# Altium PCB klor1_4_B.PcbDoc (part 1 of 2)
Units mm, origin at the board's own origin, x right, y up, seen from the top; angles counter-clockwise.
Board outline 323.11 x 118.19 mm, 2 copper layers (Top Layer, Bottom Layer); 172 components, 130 nets, 808 pads, 101 vias.
Unrouted connection lines stored in the file: 161.
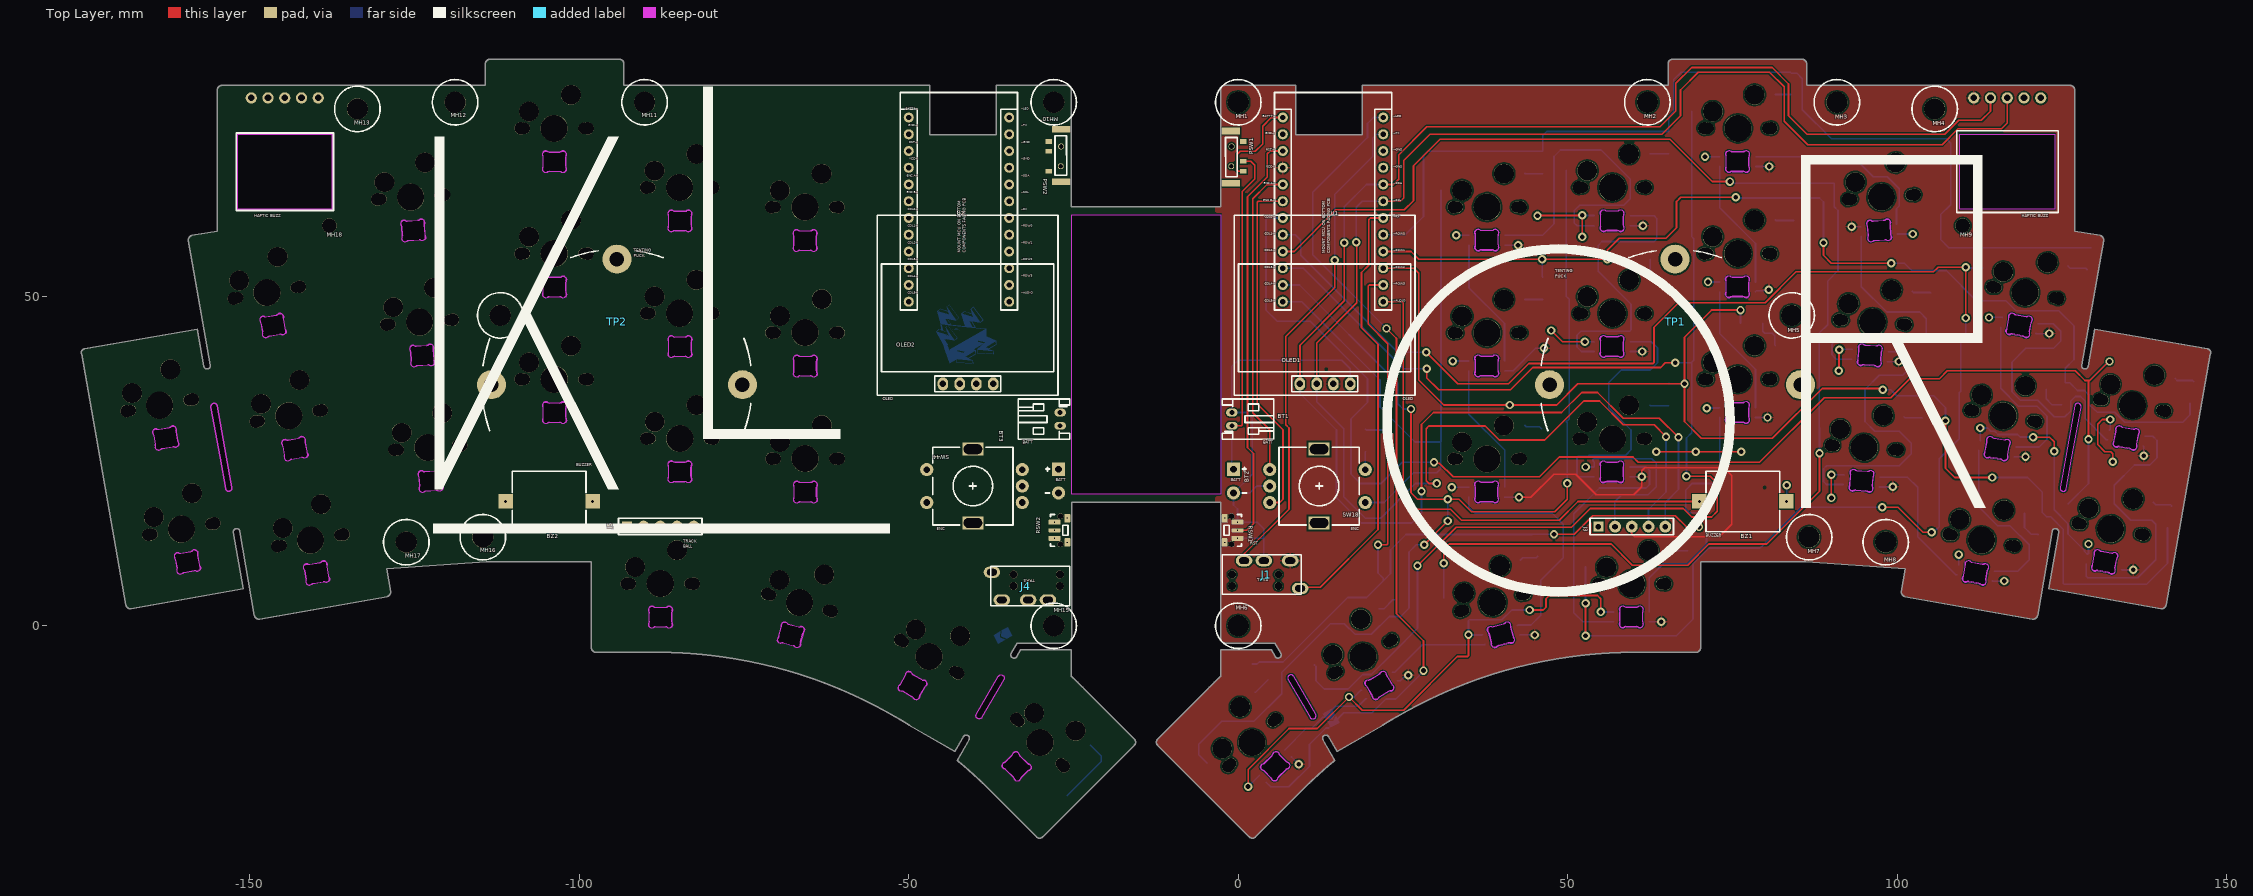
[diagram p0: Top Layer view]
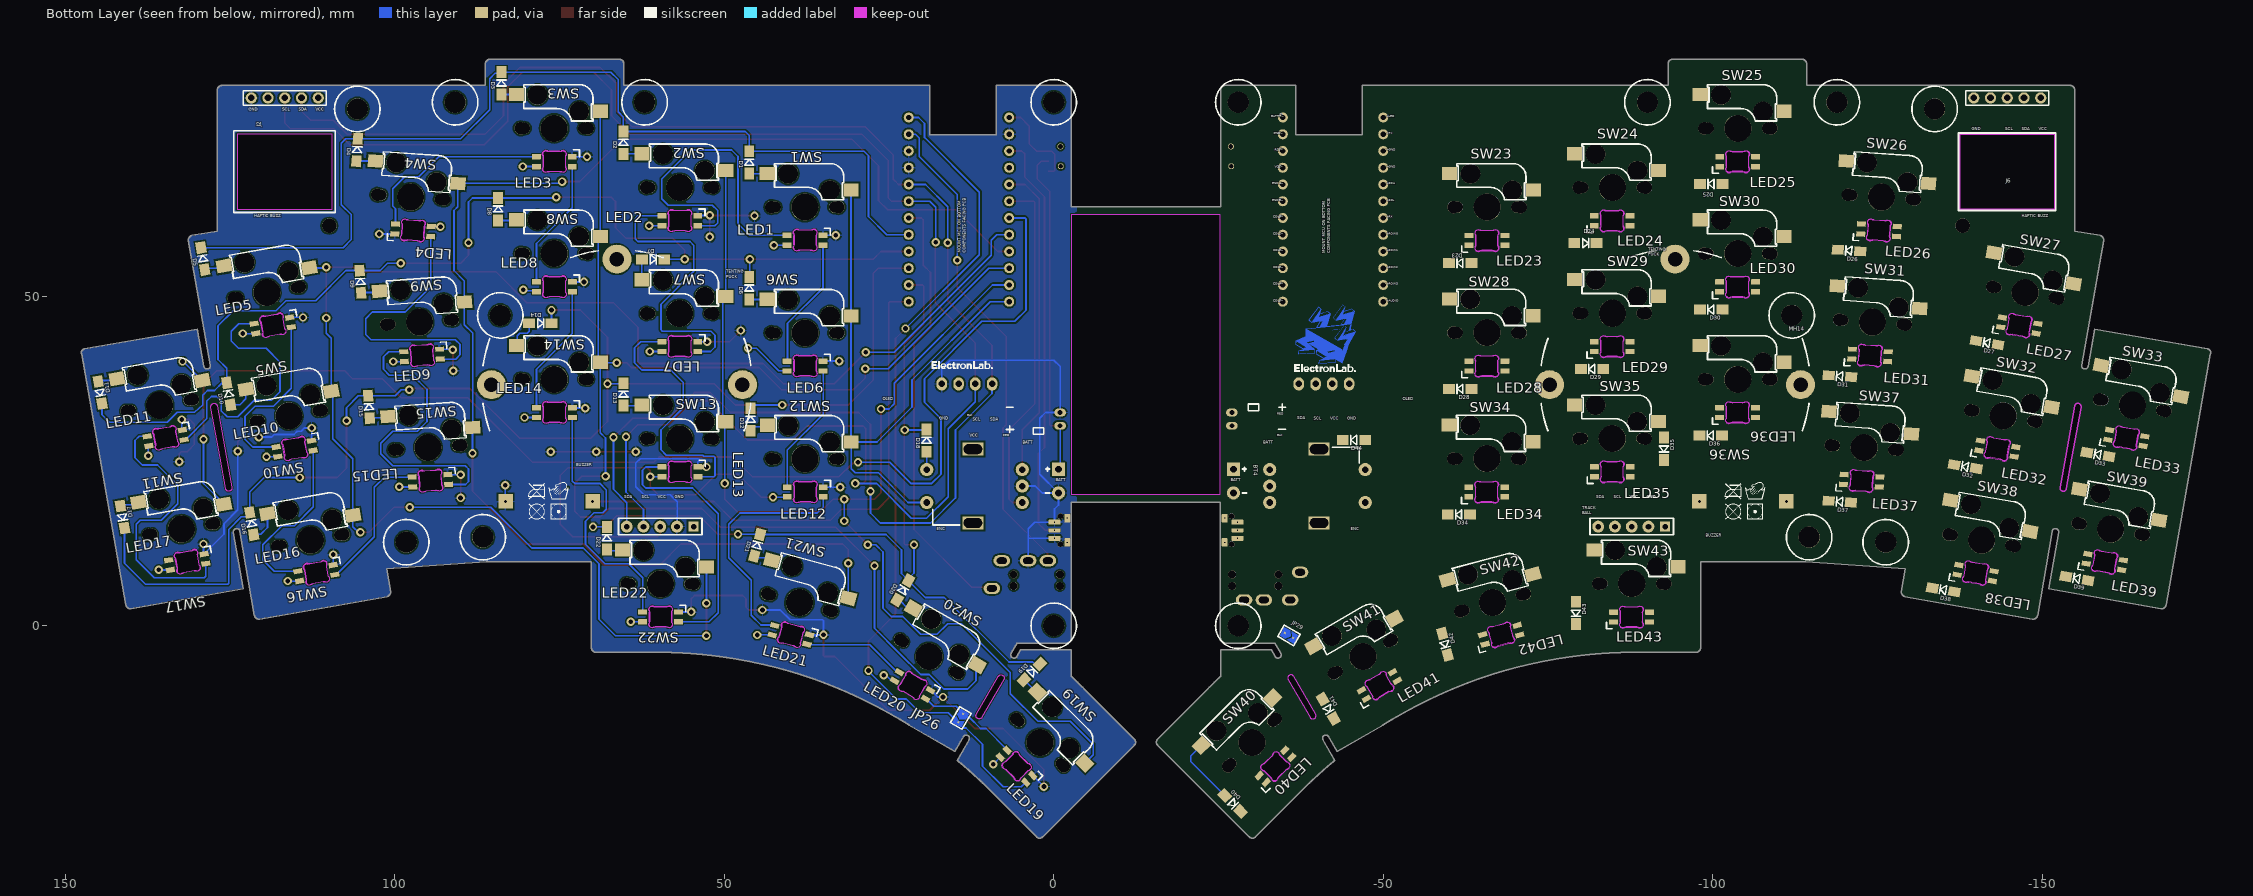
[diagram p1: Bottom Layer view, seen from below]

## Layer stack, top to bottom
Top Solder: solder mask 0.0102, Solder Resist, Dk 3.5
Top Layer: signal copper 0.0356
Dielectric 1: dielectric 0.32, FR-4, Dk 4.8
Bottom Layer: signal copper 0.0356
Bottom Solder: solder mask 0.0102, Solder Resist, Dk 3.5

## Board outline
11385 vertices, not listed, extent -175.553,-32.233 147.553,85.954
cut-out: 938 vertices, not listed, extent -39.803,-14.147 -35.499,-7.445
cut-out: -137.48,63.2 -137.48,74.6 -151.88,74.6 -151.88,63.2
cut-out: 753 vertices, not listed, extent -155.897,20.404 -152.693,33.756
cut-out: -151.88,63.2 -151.88,74.6 -137.48,74.6 -137.48,63.2
cut-out: 938 vertices, not listed, extent -39.803,-14.147 -35.499,-7.445
cut-out: 753 vertices, not listed, extent -155.897,20.404 -152.693,33.756
cut-out: -25.301,19.951 -25.301,62.4 -2.7,62.4 -2.689,62.389 -2.689,19.941
cut-out: 938 vertices, not listed, extent 7.499,-14.147 11.803,-7.445
cut-out: 109.48,63.2 109.48,74.6 123.88,74.6 123.88,63.2
cut-out: 753 vertices, not listed, extent 124.693,20.404 127.897,33.756

## Design rules (kind name [scope] priority, off if disabled: settings)
BoardOutlineClearance BoardOutlineClearance_1 [(OnLayer('Bottom Overlay') OR OnLayer('Top Overlay'))] p1: gap=0 ignorepadtopadclearanceinfootprint=FALSE
BoardOutlineClearance MH [(HasFootprint('MOUNTINGHOLE_3.2MM_M3') OR HasFootprint('MountingHole_2.2mm_M2'))] p2: gap=0 ignorepadtopadclearanceinfootprint=FALSE
BoardOutlineClearance [All] p3: gap=0.05 ignorepadtopadclearanceinfootprint=FALSE
BoardOutlineClearance LED_CUTOUT [HasFootprint('SK6812MINI-E')] p4: gap=0.01 ignorepadtopadclearanceinfootprint=FALSE
Clearance JUMPERS_RSW [All vs (HasFootprint('SW_PUSH_1P1T-MP_NO_HORIZONTAL_ALPS_SKRTLAE010_BOTH_SIDES') OR HasFootprint('SolderJumper-2_P1.3mm_Open_TrianglePad1.0x1.5mm'))] p1: gap=0.01 ignorepadtopadclearanceinfootprint=FALSE
Clearance LED [HasFootprint('SK6812MINI-E')] p2: gap=0.2 ignorepadtopadclearanceinfootprint=FALSE
Clearance [All] p3: gap=0.254 ignorepadtopadclearanceinfootprint=FALSE
HoleSize [All] p1: absolutevalues=TRUE maxlimit=5 minlimit=0.025 maxpercent=80.000 minpercent=20.000
HoleToHoleClearance SWITCH_SOCKET [All vs HasFootprint('CHERRY-CPG151101S11')] p1: gap=0 allowstackedmicrovias=TRUE
HoleToHoleClearance [All] p2: gap=0.254 allowstackedmicrovias=TRUE
MinimumSolderMaskSliver JUMPERS_RSW [All vs (HasFootprint('SolderJumper-2_P1.3mm_Open_TrianglePad1.0x1.5mm') OR HasFootprint('SW_PUSH_1P1T-MP_NO_HORIZONTAL_ALPS_SKRTLAE010_BOTH_SIDES'))] p1: minsoldermaskwidth=0.01
MinimumSolderMaskSliver [All] p2: minsoldermaskwidth=0.254
PolygonConnect [All] p1: connectstyle=Relief reliefconductorwidth=0.254 reliefentries=4 polygonreliefangle="90 Angle" airgapwidth=0.254
RoutingVias [All] p1: holewidth=0.711 width=1.27 viastyle="Through Hole" minholewidth=0.711 minwidth=1.27 maxholewidth=0.711 maxwidth=1.27
SilkToSilkClearance [All] p1: silktosilkclearance=0
SilkToSolderMaskClearance [IsPad] p1: minsilkscreentomaskgap=0 clearancetoexposedcopper=TRUE
SolderMaskExpansion [All] p1: expansion=0.102 istentingtop=FALSE
SupplyNets "Schematic Supply Nets" [InNet('GND_R')] p1: voltage=0.000
SupplyNets "Schematic Supply Nets_6" [InNet('PAD2')] p2: voltage=0.000
SupplyNets "Schematic Supply Nets_4" [InNet('+BATT_L')] p3: voltage=0.000
SupplyNets "Schematic Supply Nets_3" [InNet('VCC_L')] p4: voltage=0.000
SupplyNets "Schematic Supply Nets_2" [InNet('+BATT')] p5: voltage=0.000
SupplyNets "Schematic Supply Nets_1" [InNet('VCC')] p6: voltage=0.000
Width [All] p1: maxlimit=0.254 minlimit=0.254 preferedwidth=0.254
25 further rules are at their usual default settings.

## Classes and differential pairs
component class klor1_4_R: BT1 BT2 BZ1 D1 D2 D3 D4 D5 D6 D7 D8 D9 D10 D11 D12 D13 D14 D15 D16 D17 D18 D19 D20 D21 D22 J1 J2 J3 JP1 JP2 JP3 JP4 JP16 JP17 JP18 JP22 JP24 JP26 LED1 LED2 LED3 LED4 LED5 LED6 LED7 LED8 LED9 LED10 LED11 LED12 LED13 LED14 LED15 LED16 LED17 LED19 LED20 LED21 LED22 MH1 MH2 MH3 MH4 MH5 MH6 MH7 MH8 MH9 OLED1 PSW1 RSW1 SW1 SW2 SW3 SW4 SW5 SW6 SW7 SW8 SW9 SW10 SW11 SW12 SW13 SW14 SW15 SW16 SW17 SW18 SW19 SW20 SW21 SW22 TP2 U1
component class klor1_4_L: BT3 BT4 BZ2 D23 D24 D25 D26 D27 D28 D29 D30 D31 D32 D33 D34 D35 D36 D37 D38 D39 D40 D41 D42 D43 D44 J4 J5 J6 JP10 JP11 JP29 JP30 JP31 JP34 JP35 JP39 JP45 JP47 JP48 JP49 JP50 LED23 LED24 LED25 LED26 LED27 LED28 LED29 LED30 LED31 LED32 LED33 LED34 LED35 LED36 LED37 LED38 LED39 LED40 LED41 LED42 LED43 MH10 MH11 MH12 MH13 MH14 MH15 MH16 MH17 MH18 OLED2 PSW2 RSW2 SW23 SW24 SW25 SW26 SW27 SW28 SW29 SW30 SW31 SW32 SW33 SW34 SW35 SW36 SW37 SW38 SW39 SW40 SW41 SW42 SW43 SW44 TP1 U2

## Components (designator, comment, footprint, x,y, rotation, side; value= is the part's Value field where it differs from the comment)
BT1 "JST Connector" JST_PH_REVERSIBLE -0.97,30.35 r90 top
BT2 "Battery_Cell" custombatteryconnector_small -0.725,21.95 r270 top locked
BT3 "JST Connector" JST_PH_REVERSIBLE -27.03,32.35 r270 top
BT4 "Battery_Cell" custombatteryconnector_small -27.275,21.95 r270 bottom locked
BZ1 "Buzzer" BUZZER_MALLORY_AST1109MLTRQ_REVERSIBLE 76.575,18.86 r0 top locked
BZ2 "Buzzer" BUZZER_MALLORY_AST1109MLTRQ_REVERSIBLE -104.575,18.86 r0 top locked
D1 "D_Small" DIODE_SOD123 46.2,70.3 r270 bottom
D2 "D_Small" DIODE_SOD123 65.3,73.3 r270 bottom
D3 "D_Small" DIODE_SOD123 83.8,82.3 r270 bottom
D4 "D_Small" DIODE_SOD123 105.7,72.2 r274 bottom
D5 "D_Small" DIODE_SOD123 129.1,55.7 r260 bottom
D6 "D_Small" DIODE_SOD123 46.2,51.2 r270 bottom
D7 "D_Small" DIODE_SOD123 60.8,55.6 r0 bottom
D8 "D_Small" DIODE_SOD123 84.3,63.2 r270 bottom
D9 "D_Small" DIODE_SOD123 105.2,52.2 r266 bottom
D10 "D_Small" DIODE_SOD123 125.2,35.2 r260 bottom
D11 "D_Small" DIODE_SOD123 144.7,35.4 r80 bottom
D12 "D_Small" DIODE_SOD123 46,31.3 r270 bottom
D13 "D_Small" DIODE_SOD123 65.3,35.1 r270 bottom
D14 "D_Small" DIODE_SOD123 77.9,45.9 r0 bottom
D15 "D_Small" DIODE_SOD123 103.9,33.2 r266 bottom
D16 "D_Small" DIODE_SOD123 121.7,15.5 r260 bottom
D17 "D_Small" DIODE_SOD123 141.3,16.5 r80 bottom
D18 "D_Small" DIODE_SOD123 19.3,28.1 r270 bottom
D19 "D_Small" DIODE_SOD123 3.3,-7 r315 bottom
D20 "D_Small" DIODE_SOD123 22.9,5.4 r300 bottom
D21 "D_Small" DIODE_SOD123 45,12.2 r285 bottom
D22 "D_Small" DIODE_SOD123 67.8,13.3 r270 bottom
D23 "D_Small" DIODE_SOD123 -61.68,55.05 r180 bottom
D24 "D_Small" DIODE_SOD123 -80.68,58.05 r0 bottom
D25 "D_Small" DIODE_SOD123 -99.78,67.05 r180 bottom
D26 "D_Small" DIODE_SOD123 -120.676,56.931 r184 bottom
D27 "D_Small" DIODE_SOD123 -141.606,42.945 r190 bottom
D28 "D_Small" DIODE_SOD123 -61.68,35.95 r180 bottom
D29 "D_Small" DIODE_SOD123 -81.677,38.953 r180 bottom
D30 "D_Small" DIODE_SOD123 -99.759,47.965 r180 bottom
D31 "D_Small" DIODE_SOD123 -119.284,37.869 r184 bottom
D32 "D_Small" DIODE_SOD123 -138.306,24.145 r190 bottom
D33 "D_Small" DIODE_SOD123 -158.435,25.98 r190 bottom
D34 "D_Small" DIODE_SOD123 -61.48,16.86 r180 bottom
D35 "D_Small" DIODE_SOD123 -92.575,26.87 r90 bottom
D36 "D_Small" DIODE_SOD123 -99.68,28.85 r180 bottom
D37 "D_Small" DIODE_SOD123 -119.276,18.831 r184 bottom
D38 "D_Small" DIODE_SOD123 -134.98,5.45 r190 bottom
D39 "D_Small" DIODE_SOD123 -155.255,7.17 r190 bottom
D40 "D_Small" DIODE_SOD123 -27.157,-26.952 r45 bottom
D41 "D_Small" DIODE_SOD123 -41.648,-12.61 r60 bottom
D42 "D_Small" DIODE_SOD123 -59.367,-2.789 r75 bottom
D43 "D_Small" DIODE_SOD123 -79.225,1.95 r90 bottom
D44 "D_Small" DIODE_SOD123 -45.56,28.19 r180 bottom
J1 "MJ-4PP-9" MJ-4PP-9 -2.42,7.775 r90 top locked
J2 "Haptic Buzz" "PIMORONI HAPTIC BUZZ DRV2605L DRIVER" 116.68,69.7 r180 bottom
J3 "lv27" lvc27_onlyInput 54.63,15.05 r90 top locked
J4 "MJ-4PP-9" MJ-4PP-9 -25.58,6.025 r270 top
J5 "lv2" lvc27_onlyInput -92.78,15.05 r90 top locked value=lv27
J6 "lv2" "PIMORONI HAPTIC BUZZ DRV2605L DRIVER" -144.68,69.7 r180 bottom locked value="Haptic Buzz"
JP26 "Device_Jumper_NO_Small" SolderJumper-2_P1.3mm_Open_TrianglePad1.0x1.5mm 14.1,-14 r120 bottom
JP29 "Device_Jumper_NO_Small" SOLDERJUMPER-2_P1.3MM_OPEN_TRIANGLEPAD1.0X1.5MM -35.697,-1.459 r30 bottom
LED1 "SK6812MINI-E" SK6812MINI-E#1 37.722,58.506 r0 bottom
LED2 "SK6812MINI-E" SK6812MINI-E#1 56.743,61.447 r0 bottom
LED3 "SK6812MINI-E" SK6812MINI-E#1 75.783,70.427 r0 bottom
LED4 "SK6812MINI-E" SK6812MINI-E#1 97.211,60.001 r184 bottom
LED5 "SK6812MINI-E" SK6812MINI-E#2 118.496,45.568 r350 bottom
LED6 "SK6812MINI-E" SK6812MINI-E#1 37.72,39.412 r0 bottom
LED7 "SK6812MINI-E" SK6812MINI-E#1 56.733,42.367 r0 bottom
LED8 "SK6812MINI-E" SK6812MINI-E#1 75.769,51.422 r0 bottom
LED9 "SK6812MINI-E" SK6812MINI-E#1 95.851,41.021 r356 bottom
LED10 "SK6812MINI-E" SK6812MINI-E#2 115.173,26.87 r350 bottom
LED11 "SK6812MINI-E" SK6812MINI-E#2 134.756,28.488 r350 bottom
LED12 "SK6812MINI-E" SK6812MINI-E#1 37.703,20.297 r0 bottom
LED13 "SK6812MINI-E" SK6812MINI-E#1 56.719,23.349 r0 bottom
LED14 "SK6812MINI-E" SK6812MINI-E#1 75.769,32.349 r0 bottom
LED15 "SK6812MINI-E" SK6812MINI-E#1 94.591,21.991 r356 bottom
LED16 "SK6812MINI-E" SK6812MINI-E#2 111.886,8.008 r350 bottom
LED17 "SK6812MINI-E" SK6812MINI-E#2 131.476,9.688 r350 bottom
LED19 "SK6812MINI-E" SK6812MINI-E#1 5.632,-21.318 r45 bottom
LED20 "SK6812MINI-E" SK6812MINI-E#3 21.43,-9.065 r30 bottom
LED21 "SK6812MINI-E" SK6812MINI-E#1 39.882,-1.376 r15 bottom
LED22 "SK6812MINI-E" SK6812MINI-E#1 59.657,1.34 r0 bottom
LED23 "SK6812MINI-E" SK6812MINI-E#1 -65.743,58.467 r180 bottom
LED24 "SK6812MINI-E" SK6812MINI-E#1 -84.743,61.447 r180 bottom
LED25 "SK6812MINI-E" SK6812MINI-E#1 -103.783,70.427 r180 bottom
LED26 "SK6812MINI-E" SK6812MINI-E#1 -125.211,60.001 r184 bottom
LED27 "SK6812MINI-E" SK6812MINI-E#1 -146.496,45.568 r190 bottom
LED28 "SK6812MINI-E" SK6812MINI-E#1 -65.72,39.412 r180 bottom
LED29 "SK6812MINI-E" SK6812MINI-E#1 -84.733,42.367 r180 bottom
LED30 "SK6812MINI-E" SK6812MINI-E#1 -103.769,51.422 r180 bottom
LED31 "SK6812MINI-E" SK6812MINI-E#1 -123.851,41.021 r184 bottom
LED32 "SK6812MINI-E" SK6812MINI-E#1 -143.173,26.87 r190 bottom
LED33 "SK6812MINI-E" SK6812MINI-E#1 -162.756,28.488 r190 bottom
LED34 "SK6812MINI-E" SK6812MINI-E#1 -65.703,20.297 r180 bottom
LED35 "SK6812MINI-E" SK6812MINI-E#1 -84.75,23.375 r180 bottom
LED36 "SK6812MINI-E" SK6812MINI-E#1 -103.769,32.349 r180 bottom
LED37 "SK6812MINI-E" SK6812MINI-E#1 -122.591,21.991 r184 bottom
LED38 "SK6812MINI-E" SK6812MINI-E#1 -139.886,8.008 r190 bottom
LED39 "SK6812MINI-E" SK6812MINI-E#1 -159.476,9.688 r190 bottom
LED40 "SK6812MINI-E" SK6812MINI-E#1 -33.632,-21.318 r135 bottom
LED41 "SK6812MINI-E" SK6812MINI-E#1 -49.43,-9.065 r150 bottom
LED42 "SK6812MINI-E" SK6812MINI-E#1 -67.893,-1.366 r165 bottom
LED43 "SK6812MINI-E" SK6812MINI-E#1 -87.683,1.327 r180 bottom
MH1 "MountingHole_3.2mm_M3" MOUNTINGHOLE_3.2MM_M3 0,79.43 r0 top locked
MH2 "MountingHole_3.2mm_M3" MOUNTINGHOLE_3.2MM_M3 62.08,79.43 r0 top locked
MH3 "MountingHole_3.2mm_M3" MOUNTINGHOLE_3.2MM_M3 90.83,79.43 r0 top locked
MH4 "MountingHole_3.2mm_M3" MOUNTINGHOLE_3.2MM_M3 105.67,78.42 r0 top locked
MH5 "MountingHole_3.2mm_M3" MOUNTINGHOLE_3.2MM_M3 83.98,47.1 r0 top locked
MH6 "MountingHole_3.2mm_M3" MOUNTINGHOLE_3.2MM_M3 0,0 r0 top locked
MH7 "MountingHole_3.2mm_M3" MOUNTINGHOLE_3.2MM_M3 86.63,13.44 r0 top locked
MH8 "MountingHole_3.2mm_M3" MOUNTINGHOLE_3.2MM_M3 98.24,12.68 r0 top locked
MH9 "MountingHole_2.2mm_M2" MountingHole_2.2mm_M2 109.93,60.7 r0 top
MH10 "MountingHole_3.2mm_M3" MOUNTINGHOLE_3.2MM_M3 -28,79.43 r0 top locked
MH11 "MountingHole_3.2mm_M3" MOUNTINGHOLE_3.2MM_M3 -90.08,79.43 r0 top locked
MH12 "MountingHole_3.2mm_M3" MOUNTINGHOLE_3.2MM_M3 -118.83,79.43 r0 top locked
MH13 "MountingHole_3.2mm_M3" MOUNTINGHOLE_3.2MM_M3 -133.67,78.42 r0 top locked
MH14 "MountingHole_3.2mm_M3" MOUNTINGHOLE_3.2MM_M3 -111.98,47.1 r180 bottom locked
MH15 "MountingHole_3.2mm_M3" MOUNTINGHOLE_3.2MM_M3 -28,0 r180 top locked
MH16 "MountingHole_3.2mm_M3" MOUNTINGHOLE_3.2MM_M3 -114.63,13.44 r0 top locked
MH17 "MountingHole_3.2mm_M3" MOUNTINGHOLE_3.2MM_M3 -126.24,12.68 r0 top locked
MH18 "MountingHole_2.2mm_M2" MountingHole_2.2mm_M2 -137.93,60.7 r0 top
OLED1 "SSD1306" SSD1306_128X64OLED 13.359,47.295 r180 top locked
OLED2 "SSD1306" SSD1306_128X64OLED -40.809,47.295 r180 top locked
PSW1 "SW_DPDT_x2" MSK12C02_REVERSIBLE -2.419,74.974 r0 top locked
PSW2 "SW_DPDT_x2" MSK12C02_REVERSIBLE -25.531,67.474 r180 top locked
RSW1 "SW_Push" SW_PUSH_1P1T-MP_NO_HORIZONTAL_ALPS_SKRTLAE010_BOTH_SIDES -1.01,14.49 r270 top locked
RSW2 "SW_Push" SW_PUSH_1P1T-MP_NO_HORIZONTAL_ALPS_SKRTLAE010_BOTH_SIDES -26.99,14.49 r90 top locked
SW1 "SW_PUSH-MX" CHERRY-CPG151101S11 37.765,63.52 r180 bottom locked
SW2 "SW_PUSH-MX" CHERRY-CPG151101S11 56.765,66.5 r180 bottom locked
SW3 "SW_PUSH-MX" CHERRY-CPG151101S11 75.805,75.48 r180 bottom locked
SW4 "SW_PUSH-MX" CHERRY-CPG151101S11 97.585,65.04 r184 bottom locked
SW5 "SW_PUSH-MX" CHERRY-CPG151101S11 119.395,50.54 r170 bottom locked
SW6 "SW_PUSH-MX" CHERRY-CPG151101S11 37.763,44.427 r180 bottom locked
SW7 "SW_PUSH-MX" CHERRY-CPG151101S11 56.776,47.382 r180 bottom locked
SW8 "SW_PUSH-MX" CHERRY-CPG151101S11 75.791,56.475 r180 bottom locked
SW9 "SW_PUSH-MX" CHERRY-CPG151101S11 96.225,46.06 r176 bottom locked
SW10 "SW_PUSH-MX" CHERRY-CPG151101S11 116.072,31.842 r170 bottom locked
SW11 "SW_PUSH-MX" CHERRY-CPG151101S11 135.655,33.46 r170 bottom locked
SW12 "SW_PUSH-MX" CHERRY-CPG151101S11 37.746,25.312 r180 bottom locked
SW13 "SW_PUSH-MX" CHERRY-CPG151101S11 56.762,28.364 r180 bottom locked
SW14 "SW_PUSH-MX" CHERRY-CPG151101S11 75.791,37.402 r180 bottom locked
SW15 "SW_PUSH-MX" CHERRY-CPG151101S11 94.965,27.03 r176 bottom locked
SW16 "SW_PUSH-MX" CHERRY-CPG151101S11 112.785,12.98 r170 bottom locked
SW17 "SW_PUSH-MX" CHERRY-CPG151101S11 132.375,14.66 r170 bottom locked
SW18 "RotaryEncoder_Switch" ROTARYENCODER_ALPS_EC11E-SWITCH_VERTICAL_H20MM-KEEBIO_MODIFIED 12.27,21.2 r0 top locked
SW19 "SW_PUSH-MX" CHERRY-CPG151101S11 2.075,-17.73 r225 bottom locked
SW20 "SW_PUSH-MX" CHERRY-CPG151101S11 18.923,-4.678 r210 bottom locked
SW21 "SW_PUSH-MX" CHERRY-CPG151101S11 38.595,3.51 r195 bottom locked
SW22 "SW_PUSH-MX" CHERRY-CPG151101S11 59.699,6.354 r180 bottom locked
SW23 "SW_PUSH-MX" CHERRY-CPG151101S11 -65.765,63.52 r180 bottom locked
SW24 "SW_PUSH-MX" CHERRY-CPG151101S11 -84.765,66.5 r180 bottom locked
SW25 "SW_PUSH-MX" CHERRY-CPG151101S11 -103.805,75.48 r180 bottom locked
SW26 "SW_PUSH-MX" CHERRY-CPG151101S11 -125.585,65.04 r184 bottom
SW27 "SW_PUSH-MX" CHERRY-CPG151101S11 -147.395,50.54 r190 bottom
SW28 "SW_PUSH-MX" CHERRY-CPG151101S11 -65.742,44.465 r180 bottom locked
SW29 "SW_PUSH-MX" CHERRY-CPG151101S11 -84.755,47.42 r180 bottom locked
SW30 "SW_PUSH-MX" CHERRY-CPG151101S11 -103.791,56.475 r180 bottom locked
SW31 "SW_PUSH-MX" CHERRY-CPG151101S11 -124.225,46.06 r184 bottom
SW32 "SW_PUSH-MX" CHERRY-CPG151101S11 -144.072,31.842 r190 bottom
SW33 "SW_PUSH-MX" CHERRY-CPG151101S11 -163.655,33.46 r190 bottom
SW34 "SW_PUSH-MX" CHERRY-CPG151101S11 -65.725,25.35 r180 bottom locked
SW35 "SW_PUSH-MX" CHERRY-CPG151101S11 -84.741,28.402 r180 bottom locked
SW36 "SW_PUSH-MX" CHERRY-CPG151101S11 -103.791,37.402 r180 bottom locked
SW37 "SW_PUSH-MX" CHERRY-CPG151101S11 -122.965,27.03 r184 bottom
SW38 "SW_PUSH-MX" CHERRY-CPG151101S11 -140.785,12.98 r190 bottom
SW39 "SW_PUSH-MX" CHERRY-CPG151101S11 -160.375,14.66 r190 bottom
SW40 "SW_PUSH-MX" CHERRY-CPG151101S11 -30.075,-17.73 r135 bottom
SW41 "SW_PUSH-MX" CHERRY-CPG151101S11 -46.923,-4.678 r150 bottom
SW42 "SW_PUSH-MX" CHERRY-CPG151101S11 -66.595,3.51 r165 bottom
SW43 "SW_PUSH-MX" CHERRY-CPG151101S11 -87.705,6.38 r180 bottom
SW44 "RotaryEncoder_Switch" ROTARYENCODER_ALPS_EC11E-SWITCH_VERTICAL_H20MM-KEEBIO_MODIFIED -40.27,21.2 r180 top locked
TP1 "tenting-puck" SplitkbTentingPuckWithoutCenterHole 66.275,36.58 r270 top locked
TP2 "tenting-puck" SplitkbTentingPuckWithoutCenterHole -94.275,36.58 r270 top locked
U1 "ProMicro" PROMICRO 14.28,63.54 r0 top locked
U2 "ProMicro" PROMICRO -42.478,63.54 r0 top locked

## Footprints (in the part's own frame and the unit in brackets; to place one, negate y for a bottom-side part, rotate by r counter-clockwise, add the part's x,y. Pads: shape width x height; smd on the part's side, far side on the other; paste and mask are expansions set on the pad)
BUZZER_MALLORY_AST1109MLTRQ_REVERSIBLE [mm]
  rect 2.2x2.2 hole 0.5 mask+0: 1(-6.6,0) 2(6.6,0)
  silkscreen extent -5.6,-4.6 5.6,4.6
CHERRY-CPG151101S11 [mm]
  rect 2.3x2 smd mask+0: 1(7,2.58) 2(-5.7,5.12)
  round 1.9 hole 1.9 paste-2539.97 mask+0: Un1(-5.08,0) Un9(5.08,0)
  round 1.7 hole 1.7 paste-2539.97 mask+0: Un2(-4.5,0) Un8(4.5,0)
  round 3 hole 3 paste-2539.97 mask+0: Un4(-2.54,5.08) Un7(3.81,2.54)
  round 4.1 hole 4.1 paste-2539.97 mask+0: Un5(0,0)
  silkscreen extent -4.6,1.1 5.9,6.6, body extent -6.45,0.87 7.69,6.76, height 1.9
custombatteryconnector_small [mm]
  rrect7% 2x2 hole 1 mask+0: 1(-1.8,0)
  round 2 hole 1 mask+0: 2(1.8,0)
DIODE_SOD123 [mm]
  rect 1.8x1.5 smd mask+0: 1(-1.7,0) 2(1.7,0)
  silkscreen extent -0.5,-0.7 0.4,0.7, body extent -1.88,-0.85 1.88,0.85, height 1.2
JST_PH_REVERSIBLE [mm]
  rrect100% 1.2x1.75 hole 0.75 paste-2539.97 mask+0: 1(0,0) 2(2,0)
  silkscreen extent -2.06,-6.36 4.06,1.46
lvc27_onlyInput [mm]
  rect 1.524x1.524 hole 0.85 mask+0: 1(0,0)
  round 1.8 hole 0.85 mask+0: 2(0,-2.54) 3(0,-5.08) 4(0,-7.62) 5(0,-10.16)
  silkscreen extent -1.25,-11.4 1.25,1.25
MJ-4PP-9 [mm]
  rrect100% 1.7x2.5 hole 1.5 slot 1 at 0 deg paste-2539.97 mask+0: 1(2.1,-10.3) 2(2.1,-6.3) 3(-2.1,-11.8) 4(2.1,-3.3)
  round 1.2 hole 1.2 paste-2539.97 mask+0: Un1(-1.75,-1.5) Un2(-1.75,-8.5) Un3(0,-1.5) Un4(0,-8.5)
  silkscreen extent -3,-12 3,0
MountingHole_2.2mm_M2 [mm]
  round 2.2 hole 2.2 mask+0: Un1(0,0)
MOUNTINGHOLE_3.2MM_M3 [mm]
  round 3.2 hole 3.2 paste-2539.97 mask+0: Un1(0,0)
  silkscreen extent -3.45,-3.45 3.45,3.45
MSK12C02_REVERSIBLE [mm]
  rect 1x0.7 smd mask+0: 1(3.2,-1.5) 2(3.2,-4.5) 3(3.2,-6)
  rect 2.8x1 smd mask+0: NC(1.3,-7.85) NC(1.3,0.1)
  round 0.9 hole 0.7 paste-2539.97 mask+0: Un1(1.35,-5.25) Un2(1.4,-2.25)
  silkscreen extent 0.48,-6.86 2.29,-0.89
"PIMORONI HAPTIC BUZZ DRV2605L DRIVER" [mm]
  round 1.7 hole 1 paste-2539.97 mask+0: 1(5.08,10.4)
  rrect100% 1.7x1.7 hole 1 paste-2539.97 mask+0: 2(2.54,10.4) 3(0,10.4) 4(-2.54,10.4) 5(-5.08,10.4)
  silkscreen extent -6.3,9.3 6.3,11.5
PROMICRO [mil]
  round 60 hole 32 paste-99999 mask+0: 1(303.89,534.42) 2(303.89,434.42) 3(303.89,334.42) 4(303.89,234.42) 5(303.89,134.42) 6(303.89,34.42) 7(303.89,-65.58) 8(303.89,-165.58) 9(303.89,-265.58) 10(303.89,-365.58) 11(303.89,-465.58) 12(303.89,-565.58) 13(-296.11,-565.58) 14(-296.11,-465.58) 15(-296.11,-365.58) 16(-296.11,-265.58) 17(-296.11,-165.58) 18(-296.11,-65.58) 19(-296.11,34.42) 20(-296.11,134.42) 21(-296.11,234.42) 22(-296.11,334.42) 23(-296.11,434.42) 24(-296.11,534.42)
  silkscreen extent -346,-616 354,684
ROTARYENCODER_ALPS_EC11E-SWITCH_VERTICAL_H20MM-KEEBIO_MODIFIED [mm]
  round 2 hole 1 paste-2539.97 mask+0: A(-7.5,2.5) B(-7.5,-2.5) C(-7.5,0) S1(7,-2.5) S2(7,2.5)
  rect 3.2x2 hole 1.5 slot 2.8 at 0 deg paste-2539.97 mask+0: MP(0,-5.6) MP(0,5.6)
  silkscreen extent -6.1,-5.9 6.1,5.9
SK6812MINI-E#1 [mm]
  rrect10% 1.35x0.82 smd mask+0: 1(2.725,-0.75) 2(-2.725,-0.75) 3(-2.725,0.75) 4(2.725,0.75)
  Keep-Out Layer board cut-out: 1.661,-0.746 1.661,0.659 1.651,0.659 1.651,0.659 1.69,0.855 1.706,0.878 1.715,0.874 1.731,0.898 1.77,1.093 1.731,1.288 1.62,1.454 1.455,1.564 1.26,1.603 1.065,1.564 1.007,1.526 1.008,1.525 1.008,1.524 0.95,1.486 0.755,1.447 0.755,1.447 0.755,1.457 -0.834,1.457 -0.834,1.457 -0.834,1.447 -1.029,1.486 -1.086,1.524 -1.085,1.526 -1.143,1.564 -1.338,1.603 -1.533,1.564 -1.699,1.454 -1.809,1.288 -1.848,1.093 -1.809,0.898 -1.793,0.874 -1.789,0.876 -1.784,0.878 -1.768,0.855 -1.729,0.659 -1.739,0.659 -1.739,-0.746 -1.739,-0.746 -1.729,-0.746 -1.768,-0.941 -1.784,-0.965 -1.789,-0.963 -1.793,-0.961 -1.809,-0.985 -1.848,-1.18 -1.809,-1.375 -1.699,-1.54 -1.533,-1.651 -1.338,-1.69 -1.143,-1.651 -1.085,-1.612 -1.086,-1.611 -1.029,-1.572 -0.834,-1.534 -0.834,-1.534 -0.834,-1.543 0.755,-1.543 0.755,-1.543 0.755,-1.534 0.95,-1.572 1.008,-1.611 1.007,-1.612 1.065,-1.651 1.26,-1.69 1.455,-1.651 1.62,-1.54 1.731,-1.375 1.77,-1.18 1.731,-0.985 1.715,-0.961 1.706,-0.965 1.69,-0.941 1.651,-0.746 1.651,-0.746 1.661,-0.746
  Keep-Out Layer lines w0.05: 1.745,-0.916 cw(c1.294,-1.132) 1.042,-1.564 ccw(c0.79,-1.996) 0.79,-1.496 ; 1.745,-0.916 cw(c2.195,-0.699) 1.695,-0.699 1.695,0.707 cw(c2.195,0.707) 1.745,0.924 ccw(c1.294,1.141) 1.042,1.572 ; -1.754,0.924 cw(c-1.304,1.141) -1.051,1.572 ccw(c-0.799,2.004) -0.799,1.504 ; -1.754,0.924 cw(c-2.205,0.707) -1.705,0.707 -1.705,-0.699 ; -1.754,0.924 -1.754,0.924 ; -1.705,-0.699 cw(c-2.205,-0.699) -1.754,-0.916 ccw(c-1.304,-1.132) -1.051,-1.564 cw(c-0.799,-1.996) -0.799,-1.496 ; -1.705,-0.699 -1.705,-0.699 ; -0.799,1.504 0.79,1.504 ; -0.799,1.504 -0.799,1.504 ; -0.799,-1.496 -0.799,-1.496 ; -0.799,-1.496 0.79,-1.496 ; 0.79,1.504 ccw(c0.79,2.004) 1.042,1.572 ; 0.79,1.504 0.79,1.504 ; 0.79,-1.496 0.79,-1.496 ; 1.042,1.572 1.042,1.572
  silkscreen extent -3.82,-1.79 -2.92,-0.79, body extent -2.94,-1.4 2.94,1.4, height 0.95
SK6812MINI-E#2 [mm]
  rrect10% 1.35x0.82 smd mask+0: 1(2.725,-0.75) 2(-2.725,-0.75) 3(-2.725,0.75) 4(2.725,0.75)
  Keep-Out Layer board cut-out: 1.661,-0.746 1.661,0.659 1.651,0.659 1.651,0.659 1.69,0.855 1.706,0.878 1.715,0.874 1.731,0.898 1.77,1.093 1.731,1.288 1.62,1.454 1.455,1.564 1.26,1.603 1.065,1.564 1.007,1.526 1.008,1.525 1.008,1.524 0.95,1.486 0.755,1.447 0.755,1.447 0.755,1.457 -0.834,1.457 -0.834,1.457 -0.834,1.447 -1.029,1.486 -1.086,1.524 -1.085,1.526 -1.143,1.564 -1.338,1.603 -1.533,1.564 -1.699,1.454 -1.809,1.288 -1.848,1.093 -1.809,0.898 -1.793,0.874 -1.789,0.876 -1.784,0.878 -1.768,0.855 -1.729,0.659 -1.739,0.659 -1.739,-0.746 -1.739,-0.746 -1.729,-0.746 -1.768,-0.941 -1.784,-0.965 -1.789,-0.963 -1.793,-0.961 -1.809,-0.985 -1.848,-1.18 -1.809,-1.375 -1.699,-1.54 -1.533,-1.651 -1.338,-1.69 -1.143,-1.651 -1.085,-1.612 -1.086,-1.611 -1.029,-1.572 -0.834,-1.534 -0.834,-1.534 -0.834,-1.543 0.755,-1.543 0.755,-1.543 0.755,-1.534 0.95,-1.572 1.008,-1.611 1.007,-1.612 1.065,-1.651 1.26,-1.69 1.455,-1.651 1.62,-1.54 1.731,-1.375 1.77,-1.18 1.731,-0.985 1.715,-0.961 1.706,-0.965 1.69,-0.941 1.651,-0.746 1.651,-0.746 1.661,-0.746
  Keep-Out Layer lines w0.05: -1.754,0.924 cw(c-2.205,0.707) -1.705,0.707 -1.705,-0.699 ; -1.754,0.924 cw(c-1.304,1.141) -1.051,1.572 ccw(c-0.799,2.004) -0.799,1.504 ; -1.754,0.924 -1.754,0.924 ; -1.705,-0.699 cw(c-2.205,-0.699) -1.754,-0.916 ccw(c-1.304,-1.132) -1.051,-1.564 cw(c-0.799,-1.996) -0.799,-1.496 ; -1.705,-0.699 -1.705,-0.699 ; -0.799,1.504 -0.799,1.504 ; -0.799,1.504 0.79,1.504 ccw(c0.79,2.004) 1.042,1.572 ; -0.799,-1.496 0.79,-1.496 ; -0.799,-1.496 -0.799,-1.496 ; 1.042,1.572 cw(c1.294,1.141) 1.745,0.924 ccw(c2.195,0.707) 1.695,0.707 1.695,-0.699 ccw(c2.195,-0.699) 1.745,-0.916 cw(c1.294,-1.132) 1.042,-1.564 ccw(c0.79,-1.996) 0.79,-1.496 ; 1.042,1.572 1.042,1.572 ; 0.79,-1.496 0.79,-1.496
  silkscreen extent -3.82,-1.79 -2.92,-0.79, body extent -2.94,-1.4 2.94,1.4, height 0.95
SK6812MINI-E#3 [mm]
  rrect10% 1.35x0.82 smd mask+0: 1(2.725,-0.75) 2(-2.725,-0.75) 3(-2.725,0.75) 4(2.725,0.75)
  Keep-Out Layer board cut-out: 1.661,-0.746 1.661,0.659 1.651,0.659 1.651,0.659 1.69,0.855 1.706,0.878 1.715,0.874 1.731,0.898 1.77,1.093 1.731,1.288 1.62,1.454 1.455,1.564 1.26,1.603 1.065,1.564 1.007,1.526 1.008,1.525 1.008,1.524 0.95,1.486 0.755,1.447 0.755,1.447 0.755,1.457 -0.834,1.457 -0.834,1.457 -0.834,1.447 -1.029,1.486 -1.086,1.524 -1.085,1.526 -1.143,1.564 -1.338,1.603 -1.533,1.564 -1.699,1.454 -1.809,1.288 -1.848,1.093 -1.809,0.898 -1.793,0.874 -1.789,0.876 -1.784,0.878 -1.768,0.855 -1.729,0.659 -1.739,0.659 -1.739,-0.746 -1.739,-0.746 -1.729,-0.746 -1.768,-0.941 -1.784,-0.965 -1.789,-0.963 -1.793,-0.961 -1.809,-0.985 -1.848,-1.18 -1.809,-1.375 -1.699,-1.54 -1.533,-1.651 -1.338,-1.69 -1.143,-1.651 -1.085,-1.612 -1.086,-1.611 -1.029,-1.572 -0.834,-1.534 -0.834,-1.534 -0.834,-1.543 0.755,-1.543 0.755,-1.543 0.755,-1.534 0.95,-1.572 1.008,-1.611 1.007,-1.612 1.065,-1.651 1.26,-1.69 1.455,-1.651 1.62,-1.54 1.731,-1.375 1.77,-1.18 1.731,-0.985 1.715,-0.961 1.706,-0.965 1.69,-0.941 1.651,-0.746 1.651,-0.746 1.661,-0.746
  Keep-Out Layer lines w0.05: -0.799,-1.496 ccw(c-0.799,-1.996) -1.051,-1.564 cw(c-1.304,-1.132) -1.754,-0.916 ccw(c-2.205,-0.699) -1.705,-0.699 -1.705,0.707 ccw(c-2.205,0.707) -1.754,0.924 ; -0.799,-1.496 0.79,-1.496 ; -0.799,-1.496 -0.799,-1.496 ; -1.754,0.924 cw(c-1.304,1.141) -1.051,1.572 ccw(c-0.799,2.004) -0.799,1.504 ; -1.754,0.924 -1.754,0.924 ; 0.79,-1.496 cw(c0.79,-1.996) 1.042,-1.564 ccw(c1.294,-1.132) 1.745,-0.916 cw(c2.195,-0.699) 1.695,-0.699 1.695,0.707 cw(c2.195,0.707) 1.745,0.924 ccw(c1.294,1.141) 1.042,1.572 ; 0.79,-1.496 0.79,-1.496 ; -0.799,1.504 -0.799,1.504 ; -0.799,1.504 0.79,1.504 ; 0.79,1.504 ccw(c0.79,2.004) 1.042,1.572 ; 0.79,1.504 0.79,1.504 ; 1.042,1.572 1.042,1.572
  silkscreen extent -3.82,-1.79 -2.92,-0.79, body extent -2.94,-1.4 2.94,1.4, height 0.95
SolderJumper-2_P1.3mm_Open_TrianglePad1.0x1.5mm [mm]
  rect 0.3x0.3 smd paste-0.3 mask+0: 1(0.725,0) 2(-0.725,0)
  Top Layer region: -1.225,-0.75 -0.075,-0.75 -0.575,0 -0.075,0.75 -1.225,0.75
  Top Layer region: -0.275,0 0.225,-0.75 1.225,-0.75 1.225,0.75 0.225,0.75
  silkscreen extent -1.4,-1 1.4,1
SOLDERJUMPER-2_P1.3MM_OPEN_TRIANGLEPAD1.0X1.5MM [mm]
  rect 0.3x0.3 smd paste-0.3 mask+0: 1(0.725,0) 2(-0.725,0)
  Top Layer region: -0.275,0 0.225,-0.75 1.225,-0.75 1.225,0.75 0.225,0.75
  Top Layer region: -1.225,-0.75 -0.075,-0.75 -0.575,0 -0.075,0.75 -1.225,0.75
  silkscreen extent -1.4,-1 1.4,1
SplitkbTentingPuckWithoutCenterHole [mm]
  round 4.4 hole 2.2 mask+0: 1(-19.05,0) 1(0,19.05) 1(0,-19.05)
  silkscreen extent -20.32,-20.32 7.01,20.32
SSD1306_128X64OLED [mm]
  rrect100% 1.6x2 hole 1 paste-2539.97 mask+0: 1(-3.62,10.6) 2(-1.08,10.6) 3(1.46,10.6) 4(4,10.6)
  silkscreen extent -13.45,-15 13.95,12.3
SW_PUSH_1P1T-MP_NO_HORIZONTAL_ALPS_SKRTLAE010_BOTH_SIDES [mm]
  rrect25% 0.75x1.8 hole 0.2 mask+0: 1(-1.225,0.9) 1(1.225,0.9)
  rrect25% 0.6x1.8 hole 0.2 mask+0: 2(0,0.9)
  rrect25% 1.3x0.9 hole 0.2 mask+0: MP(-1.85,-1.05) MP(1.85,-1.05)
  round 0.9 hole 0.9 paste-2539.97 mask+0: Un1(-2.125,0) Un2(2.125,0)
  silkscreen extent -2.4,-1.15 2.4,1.5

## Part data
BT1 BT3: library part Battery_Cell
J1 J4: library part "MJ-4PP-9 TRRS"
J2 J3 J5 J6: library part Conn_01x05
LED1 LED2 LED3 LED4 LED5 LED6 LED7 LED8 LED9 LED10 LED11 LED12 LED13 LED14 LED15 LED16 LED17 LED19 LED20 LED21 LED22 LED23 LED24 LED25 LED26 LED27 LED28 LED29 LED30 LED31 LED32 LED33 LED34 LED35 LED36 LED37 LED38 LED39 LED40 LED41 LED42 LED43: library part LED-SK6812MINI-E
MH1 MH2 MH3 MH4 MH5 MH6 MH7 MH8 MH9 MH10 MH11 MH12 MH13 MH14 MH15 MH16 MH17 MH18: library part MountingHole
SW1 SW2 SW3 SW4 SW5 SW6 SW7 SW8 SW9 SW10 SW11 SW12 SW13 SW14 SW15 SW16 SW17 SW19 SW20 SW21 SW22 SW23 SW24 SW25 SW26 SW27 SW28 SW29 SW30 SW31 SW32 SW33 SW34 SW35 SW36 SW37 SW38 SW39 SW40 SW41 SW42 SW43: library part SW_PUSH-MX_SOCKET
JP26: ki_fp_filters=SolderJumper*Open*

## Via types
v1: diameter 1.27, hole 0.711, Top Layer to Bottom Layer, 101 vias

## Nets (pads, with @x,y where several pads share a name; then routed paths per layer and width w, separated by ;. In a path a pad name is that pad's centre, name@x,y a point inside that pad or via, vN(x,y) a via of type N, cw(c..) or ccw(c..) an arc to the next point about the centre after c; other vN are vias at no path point)
+BATT: PSW1.3 U1.24 | length 14.2
  Top Layer w0.254: PSW1.3@0.781,68.974 -0.025,68.974 -0.174,69.123 -0.174,71.526 0.3,72 2.6,72 3.7,73.1 3.7,75.8 5.014,77.114 U1.24@6.759,77.114
+BATT_L: PSW2.3 U2.24
AUDIO: BZ1.1 U1.12 | length 80.3
  Top Layer w0.254: U1.12@21.999,49.174 24.877,49.174 25.026,49.025 25.026,19.374 26.7,17.7 32.2,17.7 33.88,16.02 48.72,16.02 51.56,18.86 BZ1.1@69.975,18.86
AUDIO_L: BZ2.1 U2.12
col0: SW11.1 SW17.1 U1.18 | length 203
  Top Layer w0.254: v1(29.7,24.8) 29.816,24.684 30.516,24.684 32.6,22.6 45.7,22.6 48.7,25.6 59.9,25.6 60.7,24.8 79.1,24.8 88.9,34.6 99,34.6 101.9,37.5 106.4,37.5 107.6,38.7 127,38.7 128.491,37.209 129,37.209 ; v1(129,28.3) 129,37.209 ; v1(132.2,40.1) 132.1,40.1 129.209,37.209 129,37.209
  Bottom Layer w0.254: U1.18@6.759,61.874 4.349,61.874 4.2,61.725 4.2,47.9 5.9,46.2 10.9,46.2 19.6,37.5 19.6,33.9 17.1,31.4 17.1,23 18.5,21.6 21.676,21.6 24.876,24.8 v1(29.7,24.8) ; SW17.1@125.929,18.416 125.929,18.512 129,21.583 v1(129,28.3) ; SW11.1@129.209,37.216 132.093,40.1 v1(132.2,40.1)
col0_L: SW33.1 SW39.1 U2.18
col1: SW5.1 SW10.1 SW16.1 SW22.1 U1.17 | length 247.4
  Top Layer w0.254: v1(28.5,41.5) 33.3,36.7 41,36.7 44.1,39.8 62.926,39.8 63.074,39.949 63.074,45.274 66.8,49 79.937,49 84.637,53.7 105.5,53.7 106.2,54.4 v1(110.4,54.4) v1(110.4,46.7) ; v1(52.7,-1.5) v1(52.7,3.4) ; v1(97.7,18) 100.1,18 103.9,14.2 v1(105.2,14.2)
  Bottom Layer w0.254: U1.17@6.759,59.334 8.666,59.334 9.5,58.5 9.5,56.2 24.2,41.5 v1(28.5,41.5) ; v1(52.7,-1.5) 66.5,-1.5 69,1 69,9.4 71.4,11.8 79.2,11.8 85.4,18 v1(97.7,18) ; v1(52.7,3.4) SW22.1@52.699,8.934 ; v1(105.2,14.2) 105.5,14.2 106.339,15.039 SW16.1@106.339,16.736 106.339,25.339 109.4,28.4 109.4,35.372 SW10.1@109.626,35.599 109.626,43.626 110.4,44.4 v1(110.4,46.7) ; v1(110.4,54.4) 110.504,54.296 SW5.1@112.949,54.296
col1_L: SW27.1 SW32.1 SW38.1 SW43.1 U2.17
col2: SW4.1 SW9.1 SW15.1 SW21.1 U1.16 | length 215.5
  Top Layer w0.254: U1.16@6.759,56.794 8.494,56.794 14.8,63.1 25.2,63.1 26.6,64.5 26.6,69.8 30.6,73.8 65.5,73.8 71.9,67.4 v1(74.6,67.4) ; v1(31.166,9.466) 31.166,11.566 32,12.4 56.6,12.4 59.8,9.2 68.2,9.2 71.4,12.4 80.2,12.4 88.2,20.4 v1(88.2,26.2)
  Bottom Layer w0.254: SW21.1@31.166,4.19 v1(31.166,9.466) ; v1(74.6,67.4) 74.875,67.125 SW4.1@90.422,67.125 90.422,63.578 91,63 91,53.9 89.422,52.322 SW9.1@89.422,49.122 89.422,45.678 88.162,44.418 SW15.1@88.162,30.092 88.2,30.054 v1(88.2,26.2)
col2_L: SW26.1 SW31.1 SW37.1 SW42.1 U2.16
col3: SW3.1 SW8.1 SW14.1 SW20.1 U1.15 | length 219.3
  Top Layer w0.254: v1(27.2,9.1) 33.062,14.962 50.562,14.962 53.4,17.8 67.5,17.8 68.8,16.5 71.8,16.5 72.7,17.4 72.7,21.6 71.6,22.7 v1(68,22.7) ; v1(28.6,39) 28.6,37.6 30.4,35.8 41.3,35.8 44.695,39.195 64.095,39.195 64.8,39.9 v1(66.3,39.9)
  Bottom Layer w0.254: U1.15@6.759,54.254 9.846,54.254 25.1,39 v1(28.6,39) ; SW20.1@11.571,-5.944 11.79,-6.163 11.79,-8.341 13.049,-9.6 16.7,-9.6 18.9,-7.4 20.2,-7.4 23.5,-4.1 27.2,-0.4 v1(27.2,9.1) ; v1(66.3,39.9) 68.709,39.9 SW14.1@68.791,39.982 ; v1(68,22.7) 68,28.5 68.791,29.291 SW14.1@68.791,39.982 ; SW3.1@68.805,78.06 68.805,59.068 SW8.1@68.791,59.055 69.1,58.746 69.1,40.291 SW14.1@68.791,39.982
col3_L: SW25.1 SW30.1 SW36.1 SW41.1 U2.15
col4: SW2.1 SW7.1 SW13.1 SW19.1 U1.14 | length 184.5
  Top Layer w0.254: v1(26.2,32.9) 26.2,20.2 27.2,19.2 33.5,19.2 35.4,17.3 48,17.3 49.9,19.2 v1(49.9,21.6) ; v1(28.2,12.3) v1(31.8,15.9)
  Bottom Layer w0.254: SW19.1@-4.699,-20.855 -6,-19.554 -6,-18 -2.5,-14.5 2.4,-14.5 6.6,-10.3 6.6,-7.1 14,0.3 16.102,0.3 17.702,-1.3 20.2,-1.3 22.9,1.4 24.658,1.4 25.9,2.642 25.9,11.192 27.008,12.3 v1(28.2,12.3) ; U1.14@6.759,51.714 9.286,51.714 24.2,36.8 24.2,33.7 25,32.9 v1(26.2,32.9) ; v1(31.8,15.9) v1(31.8,19.2) ; SW2.1@49.765,69.08 49.765,49.973 50.2,49.538 50.2,31.381 SW13.1@49.762,30.944 49.9,30.806 v1(49.9,21.6)
col4_L: SW24.1 SW29.1 SW35.1 SW40.1 U2.14
col5: SW1.1 SW6.1 SW12.1 SW18.S1 U1.13 | length 91.1
  Bottom Layer w0.254: U1.13@6.759,49.174 9.626,49.174 21.5,37.3 21.5,33.2 26.808,27.892 SW12.1@30.746,27.892 ; SW18.S1@19.27,18.7 22.1,18.7 26.6,23.2 30.1,23.2 30.746,23.846 SW12.1@30.746,27.892 ; SW1.1@30.765,66.1 30.765,47.009 SW6.1@30.763,47.007 30.763,27.909 SW12.1@30.746,27.892
col5_L: SW23.1 SW28.1 SW34.1 SW44.S1 U2.13
ENCA: SW18.A U1.20 | length 47.6
  Top Layer w0.254: SW18.A@4.77,23.7 4.77,29.73 2.2,32.3 2.2,64.8 4.354,66.954 U1.20@6.759,66.954
ENCA_L: SW44.A U2.20
ENCB: SW18.B U1.19 | length 52.8
  Top Layer w0.254: SW18.B@4.77,18.7 6.3,18.7 6.8,19.2 6.8,29.758 2.9,33.658 2.9,64.265 3.049,64.414 U1.19@6.759,64.414
ENCB_L: SW44.B U2.19